# Altium PCB PS2.PcbDoc
Units mil, origin at the board's own origin, x right, y up, seen from the top; angles counter-clockwise.
Board outline 2244.09 x 1377.95 mil, 2 copper layers (Top Layer, Bottom Layer); 35 components, 23 nets, 101 pads, 22 vias.
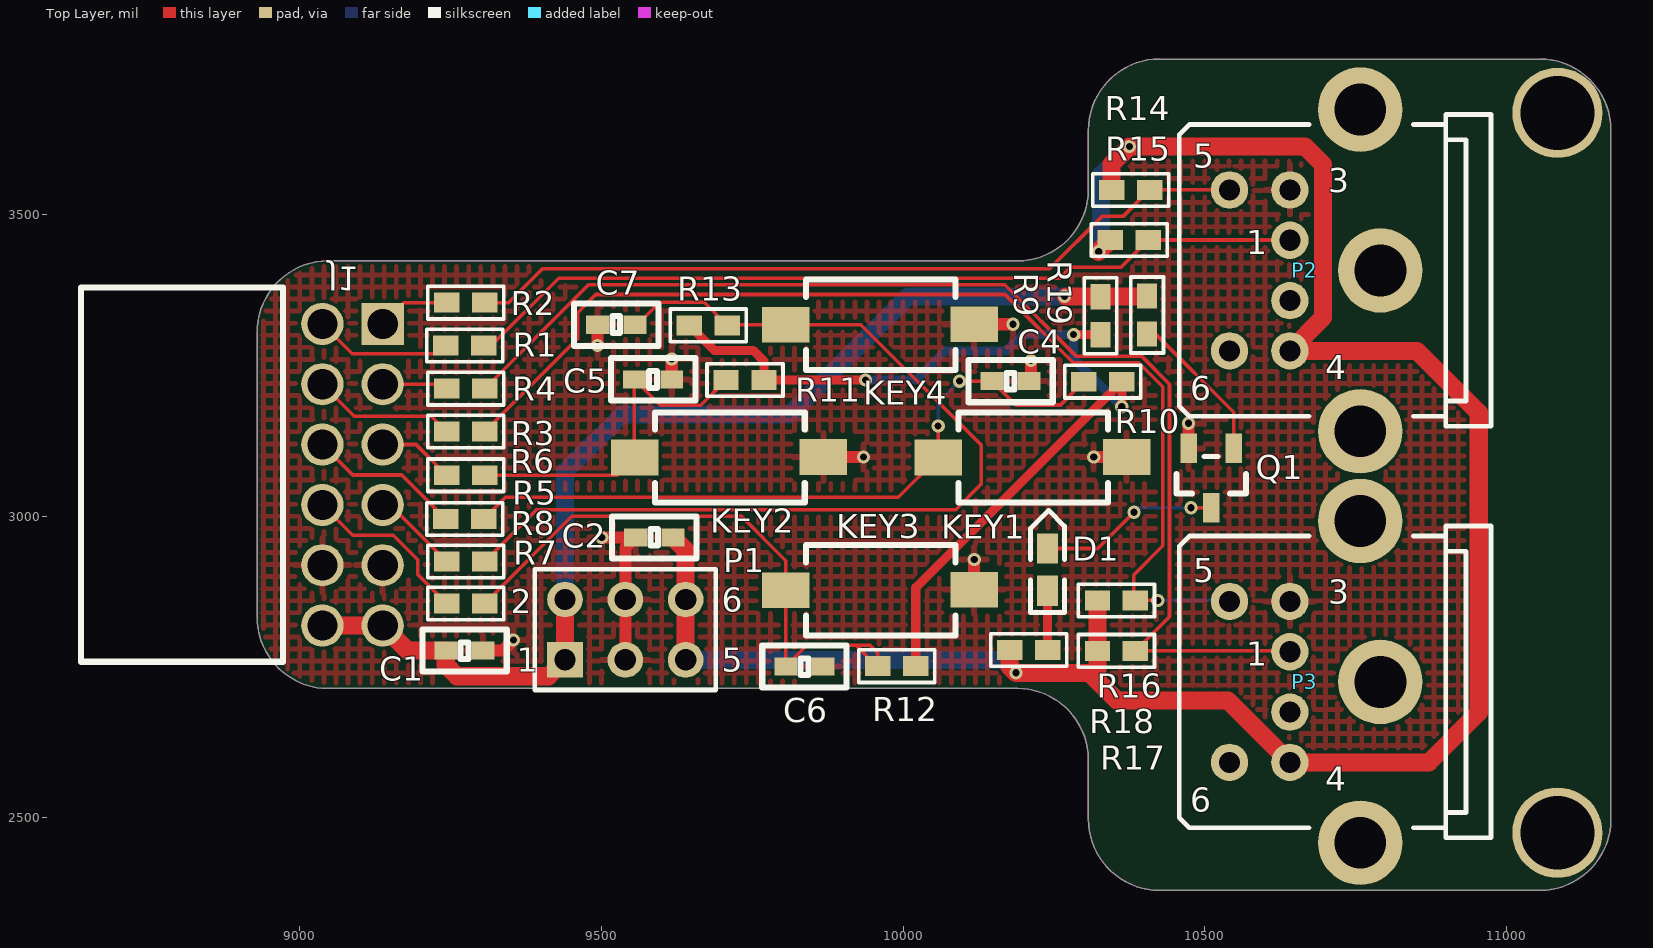
[diagram p0: Top Layer view]
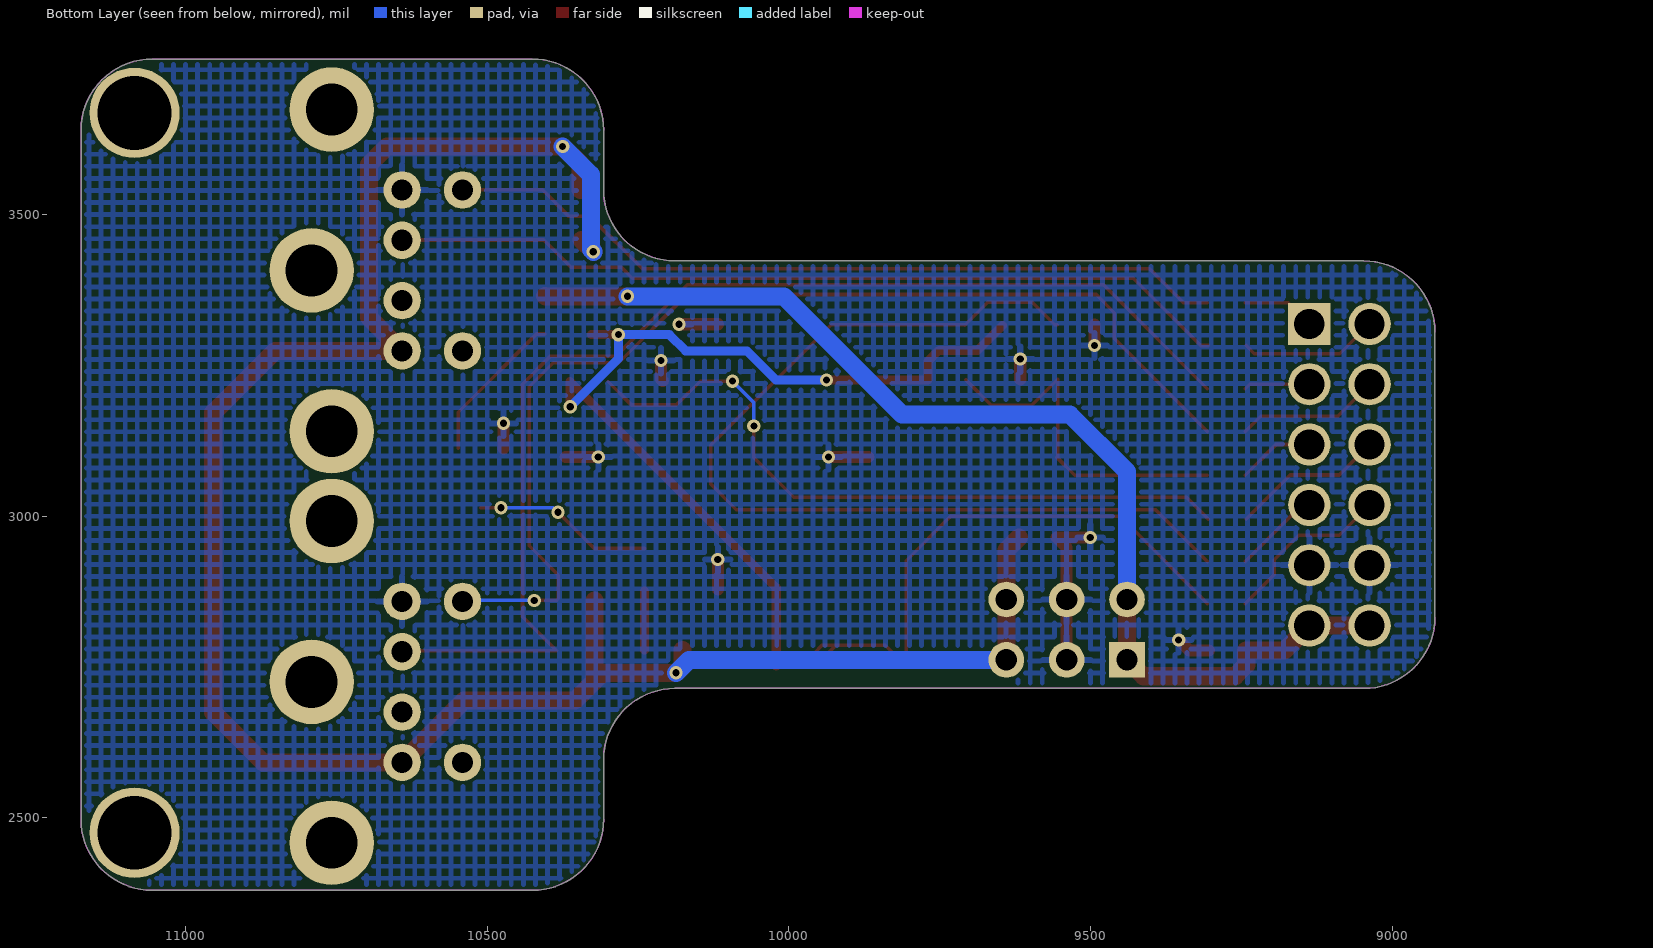
[diagram p1: Bottom Layer view, seen from below]

## Layer stack, top to bottom
Top Solder: solder mask 0.4, Solder Resist, Dk 3.5
Top Layer: signal copper 1.4
Dielectric1: core 12.6, FR-4, Dk 4.8
Bottom Layer: signal copper 1.4
Bottom Solder: solder mask 0.4, Solder Resist, Dk 3.5

## Board outline
8929.13,2832.68 ccw(c9047.24,2832.68) 9047.24,2714.57 10188.98,2714.57 cw(c10188.98,2596.46) 10307.09,2596.46 10307.09,2498.03 ccw(c10425.2,2498.03) 10425.2,2379.92 11055.12,2379.92 ccw(c11055.12,2498.03) 11173.23,2498.03 11173.23,3639.76 ccw(c11055.12,3639.76) 11055.12,3757.87 10425.2,3757.87 ccw(c10425.2,3639.76) 10307.09,3639.76 10307.09,3541.34 cw(c10188.98,3541.34) 10188.98,3423.23 9047.24,3423.23 ccw(c9047.24,3305.12) 8929.13,3305.12

## Design rules (kind name [scope] priority, off if disabled: settings)
Clearance [All] p1: gap=5
ComponentClearance paizhen [(HasFootprint('2X6P RIGHT') OR HasFootprint('HDR2X3') OR HasFootprint('PS2'))] p1: gap=0 collisioncheckmode=3 verticalgap=0 showdistances=FALSE
ComponentClearance [All] p2: gap=5 collisioncheckmode=3 verticalgap=5 showdistances=FALSE
FabricationTestpoint [(IsPad And (OnTopLayer Or OnBottomLayer))] p1: side=3 testpointundercomponent=TRUE minsize=40 maxsize=100 preferedsize=60 minholesize=0 maxholesize=40 preferedholesize=32 testpointgrid=1 allowsidetop=TRUE allowsidebottom=TRUE usegrid=TRUE gridtolerance=0.01
HoleSize [All] p1: absolutevalues=TRUE maxlimit=800 minlimit=0 maxpercent=80.000 minpercent=20.000
HoleToHoleClearance [All] p1: gap=0 allowstackedmicrovias=TRUE
MinimumSolderMaskSliver [All] p1: minsoldermaskwidth=0.2
PlaneClearance [All] p1: clearance=10
PlaneConnect [All] p1: planeconnectstyle=Direct reliefexpansion=10 reliefentries=4 reliefconductorwidth=30 reliefairgap=6
PolygonConnect [All] p1: connectstyle=Relief reliefconductorwidth=10 reliefentries=4 polygonreliefangle="90 Angle" airgapwidth=10
RoutingVias [All] p1: holewidth=12 width=22 viastyle="Through Hole" minholewidth=12 minwidth=22 maxholewidth=12 maxwidth=22
SilkToSilkClearance [All] p1: silktosilkclearance=0
SilkToSolderMaskClearance SilkscreenOverComponentPads [IsPad] p1: minsilkscreentomaskgap=0 clearancetoexposedcopper=TRUE
SolderMaskExpansion [All] p1: expansion=4
Width [All] p1: maxlimit=50 minlimit=6 preferedwidth=10
21 further rules are at their usual default settings.

## Components (designator, comment, footprint, x,y, rotation, side; value= is the part's Value field where it differs from the comment)
C1 "0.1uF" 0603C 9304,2777.5 r180 top
C2 "0.1uF" 0603C 9556.5,2965 r0 top
C4 "0.1uF" 0603C 10209,3224 r180 top
C5 "0.1uF" 0603C 9616.5,3227 r180 top
C6 "0.1uF" 0603C 9867.5,2751 r180 top
C7 "0.1uF" 0603C 9493.5,3317.5 r0 top
D1 "LED_GREEN" LED-0603G 10239.5,2876.5 r90 top
J1 "PMOD-LEFT" "2X6P RIGHT" 9137.4,2818.9 r90 top locked
KEY1 "KEY" SMD-3X6X2.5 10368,3097.5 r180 top
KEY2 "KEY" SMD-3X6X2.5 9865.5,3097.5 r180 top
KEY3 "KEY" SMD-3X6X2.5 10115.5,2877.5 r180 top
KEY4 "KEY" SMD-3X6X2.5 10115.5,3317.5 r180 top
P1 "Header 3X2" HDR2X3 9439.5,2762 r0 top
P2 "PS2" PS2 10641,3457.5 r270 top
P3 "PS2" PS2 10641,2775.5 r270 top
Q1 "MMBT3904-C20526" SOT-23-3_L2.9-W1.3-P1.90-LS2.4-BR 10510.5,3063.5 r90 top
R1 "33" 0603_Q0603A 9305,3283 r180 top
R2 "33" 0603_Q0603A 9243.5,3354 r0 top
R3 "33" 0603_Q0603A 9306.5,3140.5 r180 top
R4 "33" 0603_Q0603A 9243.5,3211.5 r0 top
R5 "33" 0603_Q0603A 9305,2995.5 r180 top
R6 "33" 0603_Q0603A 9243.5,3068 r0 top
R7 "33" 0603_Q0603A 9306.5,2855.5 r180 top
R8 "33" 0603_Q0603A 9243.5,2925 r0 top
R9 "33" 0603_Q0603A 10327,3364 r270 top
R10 "4.7K" 0603_Q0603A 10299.5,3223 r0 top
R11 "4.7K" 0603_Q0603A 9706.5,3226 r0 top
R12 "4.7K" 0603_Q0603A 9958,2751.5 r0 top
R13 "4.7K" 0603_Q0603A 9708.5,3316.5 r180 top
R14 "4.7K" 0603_Q0603A 10408.5,3541 r180 top
R15 "4.7K" 0603_Q0603A 10406.5,3458 r180 top
R16 "4.7K" 0603_Q0603A 10385,2860.5 r180 top
R17 "4.7K" 0603_Q0603A 10385,2777 r180 top
R18 "300" 0603_Q0603A 10176.5,2778.5 r0 top
R19 "5.1K" 0603_Q0603A 10404.5,3365 r270 top

## Footprints (in the part's own frame and the unit in brackets; to place one, negate y for a bottom-side part, rotate by r counter-clockwise, add the part's x,y. Pads: shape width x height; smd on the part's side, far side on the other; paste and mask are expansions set on the pad)
"2X6P RIGHT" [mil] "12P双排右弯排母"
  rect 70x70 hole 50: 1(500,0)
  round 70 hole 50: 2(500,100) 3(400,0) 4(400,100) 5(300,0) 6(300,100) 7(200,0) 8(200,100) 9(100,0) 10(100,100) 11(0,0) 12(0,100)
  silkscreen extent -60,165 560,500, body extent -55,-173 555,323, height 198
0603_Q0603A [mil]
  rect 42x33 smd: 1(0,0) 2(62.93,0)
  silkscreen extent -32,-27 94,27
0603C [mil]
  rect 38x30 smd: 1(0,0) 2(62,0)
  silkscreen extent -39,-35 101,35
HDR2X3 [mm] "Connector; Header; 3x2 Position"
  rect 1.5x1.5 hole 0.9: 1(0,0)
  round 1.5 hole 0.9: 2(0,2.54) 3(2.54,0) 4(2.54,2.54) 5(5.08,0) 6(5.08,2.54)
  silkscreen extent -1.27,-1.27 6.35,3.81
LED-0603G [mil]
  rect 50x35 smd: A(0,0.26) K(70,0.26)
  silkscreen extent -36,-28 134,28, body extent 4,-15 66,17, height 24
PS2 [mil]
  round 62 hole 35: 1(0,0) 2(100,0) 3(-83.33,0) 4(183.33,0) 5(-83.33,-100) 6(183.33,-100)
  round 140 hole 86: 7(316.67,116.67) 8(-216.67,116.67) 9(50,150)
  silkscreen extent -208,-183 308,333
SMD-3X6X2.5 [mm]
  rect 2x1.5 smd: 1(-0.059,-0.02) 3(7.874,0)
  silkscreen extent 0.73,-1.9 7.03,1.9, body extent -0.19,-1.78 7.81,1.72, height 2.59
SOT-23-3_L2.9-W1.3-P1.90-LS2.4-BR [mm]
  rect 1.25x0.7 smd: 1(1.25,-0.95) 2(1.25,0.95) 3(-1.25,0)
  silkscreen extent -0.65,-1.46 0.9,1.46

## Part data
C1 C2 C4 C5 C6 C7: library part CAP, "无极性电容"
D1: library part LED
J1: library part "Female HDR2X6"
P1: "Header, 3-Pin, Dual row"
R1 R2 R3 R4 R5 R6 R7 R8 R9 R10 R11 R12 R13 R14 R15 R16 R17 R18 R19: library part RES

## Free pads (board coordinates)
  round 149.61 hole 122.05: 1(11084.5,2475.5) 1(11084.5,3668.5)

## Via types
v1: diameter 22, hole 12, Top Layer to Bottom Layer, 22 vias

## Nets (pads, with @x,y where several pads share a name; then routed paths per layer and width w, separated by ;. In a path a pad name is that pad's centre, name@x,y a point inside that pad or via, vN(x,y) a via of type N, cw(c..) or ccw(c..) an arc to the next point about the centre after c; other vN are vias at no path point)
GND: C1.1 C2.1 C4.1 C5.1 C6.1 C7.1 J1.9 J1.10 KEY1.1 KEY2.1 KEY3.1 KEY4.1 P1.3 P1.4 P2.3 P3.3 Q1.2 | length 703.4
  Top Layer w20: C1.1 9336.5,2777.5 v1(9354,2795) ; v1(9493.5,3283) C7.1 ; v1(9500.5,2965) C2.1 9539.5,2948 P1.4 P1.3 ; C5.1 v1(9616.5,3260.5) ; KEY2.1 v1(9934.21,3098.29) ; KEY3.1 v1(10117.81,2928.31) ; KEY4.1 v1(10182.29,3318.29) ; C4.1 10212,3227 v1(10212,3258) ; v1(10315.79,3098.29) KEY1.1 ; Q1.2 v1(10473.1,3154.1)
KEY1: C4.2 KEY1.3 R5.1 R10.1 | length 1174.8
  Top Layer w6: R5.1 9341,3031.5 9992,3031.5 KEY1.3 v1(10058,3149.5) ; v1(10093.5,3224) C4.2 10186.5,3184.5 10261,3184.5 R10.1
  Bottom Layer w6: v1(10058,3149.5) 10058,3188.5 v1(10093.5,3224)
KEY2: C5.2 KEY2.3 R6.2 R11.1 | length 578.4
  Top Layer w6: R6.2 9526,3068 KEY2.3 9554.5,3098.5 C5.2 9597.5,3184 9664.5,3184 R11.1
KEY3: C6.2 KEY3.3 R7.1 R12.1 | length 1009
  Top Layer w6: R7.1 9451,3000 9732,3000 9805.5,2926.5 KEY3.3 C6.2 9840.5,2786 9922,2786 ; 9922,2786 9945,2786 9958,2773 R12.1 9956.5,2751.5 9922,2786
KEY4: C7.2 KEY4.3 R8.2 R13.1 | length 1628.9
  Top Layer w6: R8.2 9392.43,3011 10087,3011 10129.5,3053.5 10129.5,3118 9930,3317.5 KEY4.3 9709.5,3317.5 R13.1 9670.5,3354.5 9596.5,3354.5 9559.5,3317.5 C7.2
KEYBOARD_CLK: P2.5 R2.2 R14.1 | length 1312.1
  Top Layer w6: R2.2 9346,3354 9402.5,3410.5 10243,3410.5 10329.5,3497 10364.5,3497 R14.1 10540.83,3541 P2.5
KEYBOARD_DATA: P2.1 R1.1 R15.1 | length 1408.7
  Top Layer w6: R1.1 9317.5,3283 9429,3394.5 10259.5,3394.5 10278,3413 10361.5,3413 R15.1 10640.5,3458 P2.1
MOUSE_CLK: P3.5 R3.1 R16.1 | length 1838.6
  Top Layer w6: R3.1 9460.5,3294.5 9460.5,3337.5 9490.5,3367.5 10168.94,3367.5 10281.94,3254.5 10390.44,3254.5 10430.5,3214.44 10430.5,2951 10382,2902.5 10382,2863.5 R16.1 v1(10422,2860.5)
  Bottom Layer w6: v1(10422,2860.5) 10539.33,2860.5 P3.5
MOUSE_DATA: P3.1 R4.2 R17.1 | length 1996.5
  Top Layer w6: R4.2 9470.65,3375.72 9478.43,3383.5 10168.5,3383.5 10286.5,3265.5 10395,3265.5 10441.5,3219 10441.5,2833.5 R17.1 10639.5,2777 P3.1
NetD1_A: D1.A R18.2 | length 98.1
  Top Layer w15: D1.A 10239.43,2876.32 R18.2
NetD1_K: D1.K Q1.3 | length 300
  Top Layer w6: D1.K 10322.5,2946.5 v1(10382.5,3006.5) ; v1@10476.3,3014.3 v1(10477,3014.3) Q1.3
  Bottom Layer w6: v1(10382.5,3006.5) 10390.3,3014.3 v1(10477,3014.3)
NetQ1_1: Q1.1 R19.2 | length 256.9
  Top Layer w6: R19.2 10418.43,3302.07 10547.9,3172.6 Q1.1
PMODA5: J1.6 R5.2 | length 255.8
  Top Layer w6: J1.6 9087.79,3068.5 9169.07,3068.5 R5.2
PMODA6: J1.5 R6.1 | length 127.2
  Top Layer w6: J1.5 9192.6,3118.9 R6.1
PMODA7: J1.8 R7.2 | length 288.2
  Top Layer w6: J1.8 9087.79,2968.5 9155,2968.5 9195.5,2928 9195.5,2903.57 R7.2
Q6: J1.7 R8.1 | length 145
  Top Layer w6: J1.7 9149.6,3018.9 R8.1
T21_N: J1.1 R2.1 | length 120.6
  Top Layer w6: J1.1 9172.5,3354 R2.1
T21_P: J1.2 R1.2 | length 230.7
  Top Layer w6: J1.2 9086.79,3269.5 9228.57,3269.5 R1.2
T22_N: J1.3 R4.1 | length 109.2
  Top Layer w6: J1.3 9236.1,3218.9 R4.1
T22_P: J1.4 R3.2 | length 238.6
  Top Layer w6: J1.4 9090.29,3166 9218.07,3166 R3.2
VCC3.3: C1.2 J1.11 J1.12 P1.1 P1.2 R9.1 R19.1 | length 1857.5
  Top Layer w30: J1.12 J1.11 9178.79,2777.5 C1.2 9242,2753.5 9260.68,2734.82 9412.32,2734.82 P1.1 P1.2 ; v1@10270,3364 R9.1 10403.5,3364 R19.1
  Bottom Layer w30: P1.2 9439.5,3074 9534.5,3169 9812.5,3169 10008,3364.5 v1(10267.5,3364.5)
VCC3.3_KEY: R9.2 R10.2 R11.2 R12.2 R13.2 | length 1576
  Top Layer w15: R13.2 9687.07,3275 9751.5,3275 9769.43,3257.07 R11.2 9935.5,3226 v1@9937.5,3224 ; R12.2 10020.93,2881.5 R10.2 v1(10362.43,3181.57) ; v1(10282.57,3301.07) R9.2
  Bottom Layer w15: v1(9937.5,3226) 10021.5,3226 10069.5,3274 10171.23,3274 10198.3,3301.07 v1(10282.57,3301.07) 10282.57,3261.43 v1(10362.43,3181.57)
VCC5: C2.2 P1.5 P1.6 P2.4 P3.4 R14.2 R15.2 R16.2 R17.2 R18.1 | length 3631.5
  Top Layer w30: C2.2 9639.5,2944 P1.6 P1.5 ; R18.1 10176.5,2751 v1(10187,2740.5) 10308.5,2740.5 10322.07,2726.93 ; R16.2 R17.2 10322.07,2726.93 ; v1(10324.07,3438.5) R15.2 ; R14.2 10345.57,3583.57 v1(10375,3613) 10666,3613 10696,3583 10696,3329.17 P2.4 10851.83,3274.17 10954,3172 10954,2675 10871.17,2592.17 P3.4 10538.67,2694.5 10354.5,2694.5 10322.07,2726.93
  Bottom Layer w30: P1.5 10165.5,2762 v1(10187,2740.5) ; v1(10324.07,3438.5) 10328.01,3442.44 10328.01,3566.01 v1(10375,3613)
pads on no net: P2.2 P2.6 P2.7 P2.8 P2.9 P3.2 P3.6 P3.7 P3.8 P3.9

## Polygon pours and split planes (outlines as drawn)
GND on Bottom Layer "Top Layer-No Net 1" (hatched 90Degree grid 20 track 8, remove dead copper, pour order 1006): 8683.5,3969.5 11174,3969.5 11339.5,3804 11342,3801.5 11342,2198.5 9322.5,2198.5 9238.5,2114.5 9160,2193 8483,2193
GND on Top Layer "Top Layer-No Net 1" (hatched 90Degree grid 20 track 8, remove dead copper, pour order 1008): 8813,3920.5 8813,2597 9227.5,2182.5 9290,2120 11231,2120 11231,3777 10936,4072

## Keep-outs
Keep-Out Layer:
  the board outline again, w0.5

## Silkscreen, mask and mechanical layers (free items; w line width, h text height)
Top Overlay:
  text "PS2_KEYBOARD" at 7418.5,4682 h40
  text "PS2_MOUSE" at 7390,4561.5 h40

## Text inside footprints (layer, text, board x,y; h text height)
P1: Top Overlay "6" at 9699.5,2842 h40; Top Overlay "5" at 9699.5,2742 h40; Top Overlay "2" at 9350,2839 h40; Top Overlay "1" at 9359.5,2742 h40
P2: Top Overlay "5" at 10481,3577.5 h40; Top Overlay "6" at 10476,3192.5 h40; Top Overlay "4" at 10699.57,3227.4 h40; Top Overlay "3" at 10704.9,3536.73 h40; Top Overlay "1" at 10568.9,3434.07 h40
P3: Top Overlay "5" at 10481,2890.5 h40; Top Overlay "6" at 10476,2510.5 h40; Top Overlay "4" at 10699.57,2545.4 h40; Top Overlay "3" at 10704.9,2854.73 h40; Top Overlay "1" at 10568.9,2752.07 h40